# Altium PCB Powerbank_PCB.PcbDoc
Units mm, origin at the board's own origin, x right, y up, seen from the top; angles counter-clockwise.
Board outline 72.2 x 41.91 mm, 4 copper layers (Top Layer, 3V3, GND, Bottom Layer), stack 1.57 mm thick; 74 components, 44 nets, 257 pads, 101 vias.
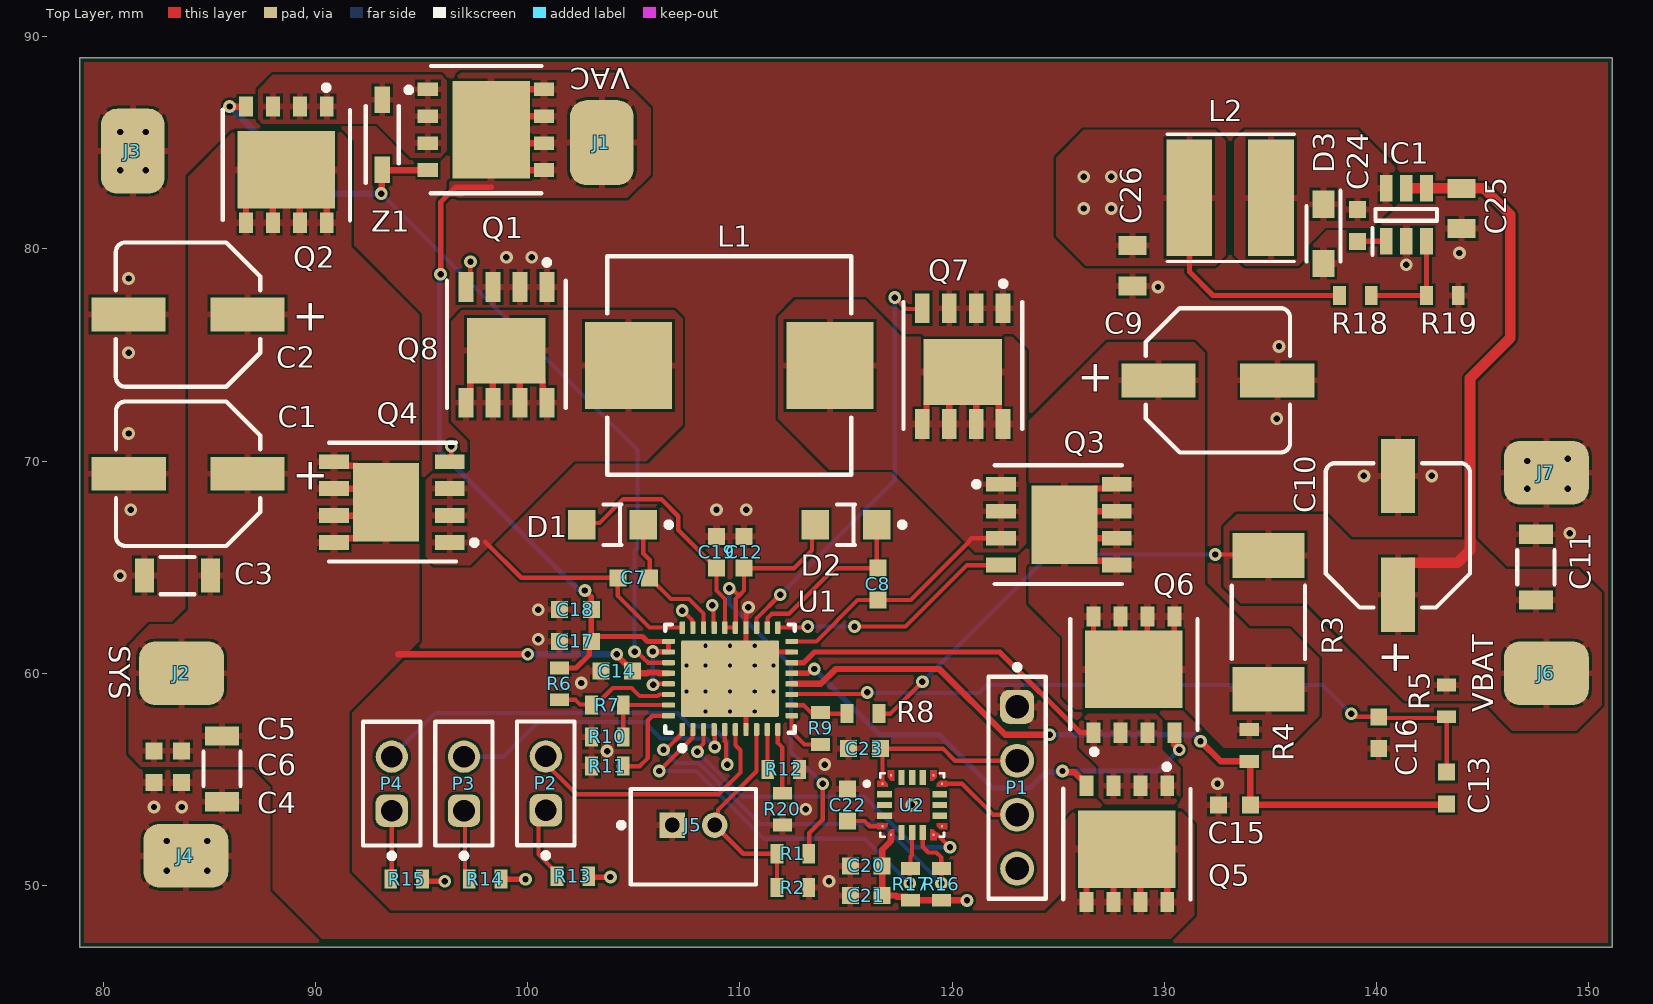
[diagram p0: Top Layer view]
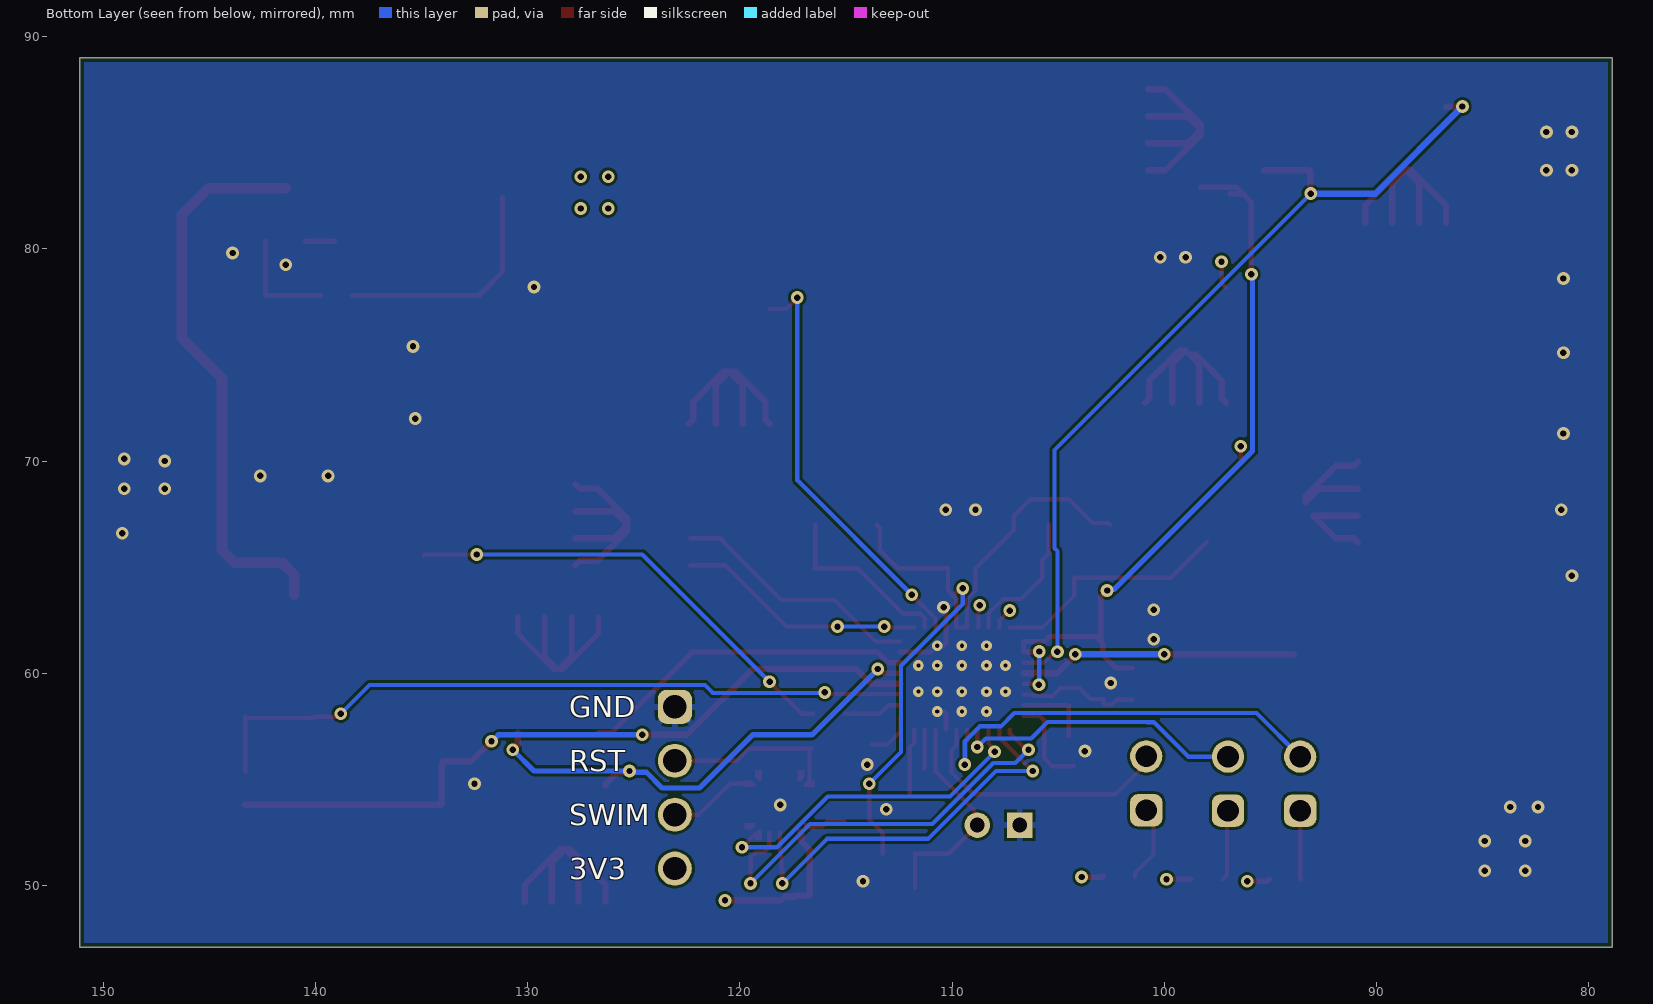
[diagram p1: Bottom Layer view, seen from below]
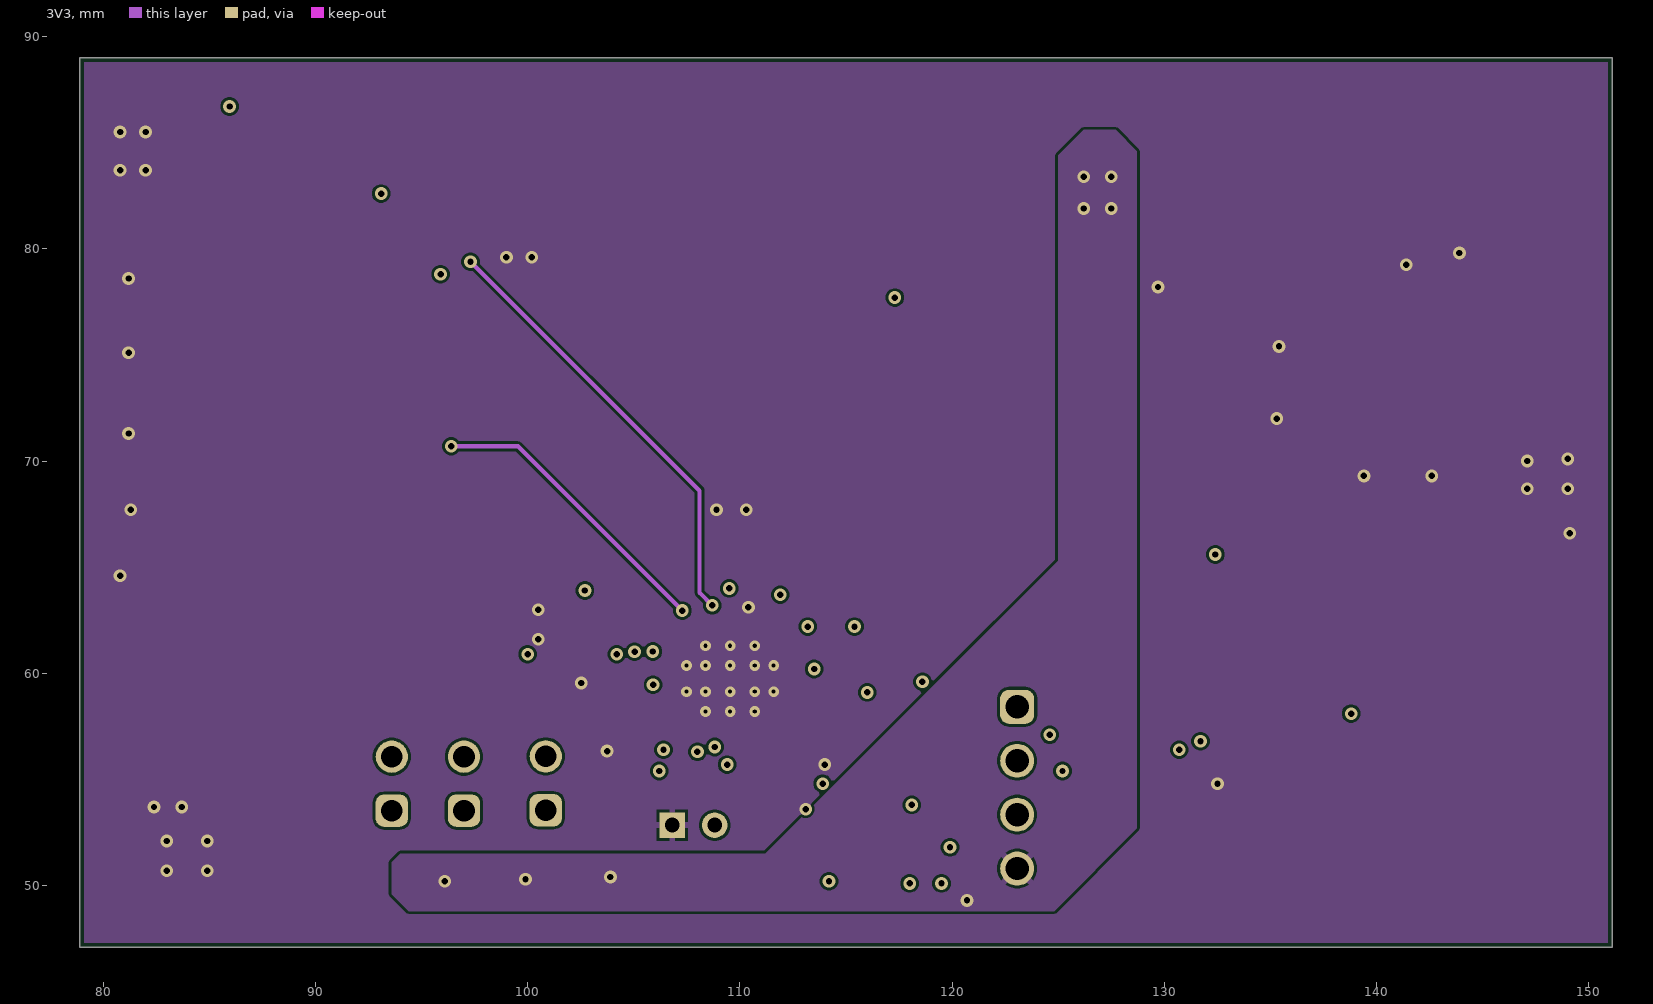
[diagram p2: 3V3]
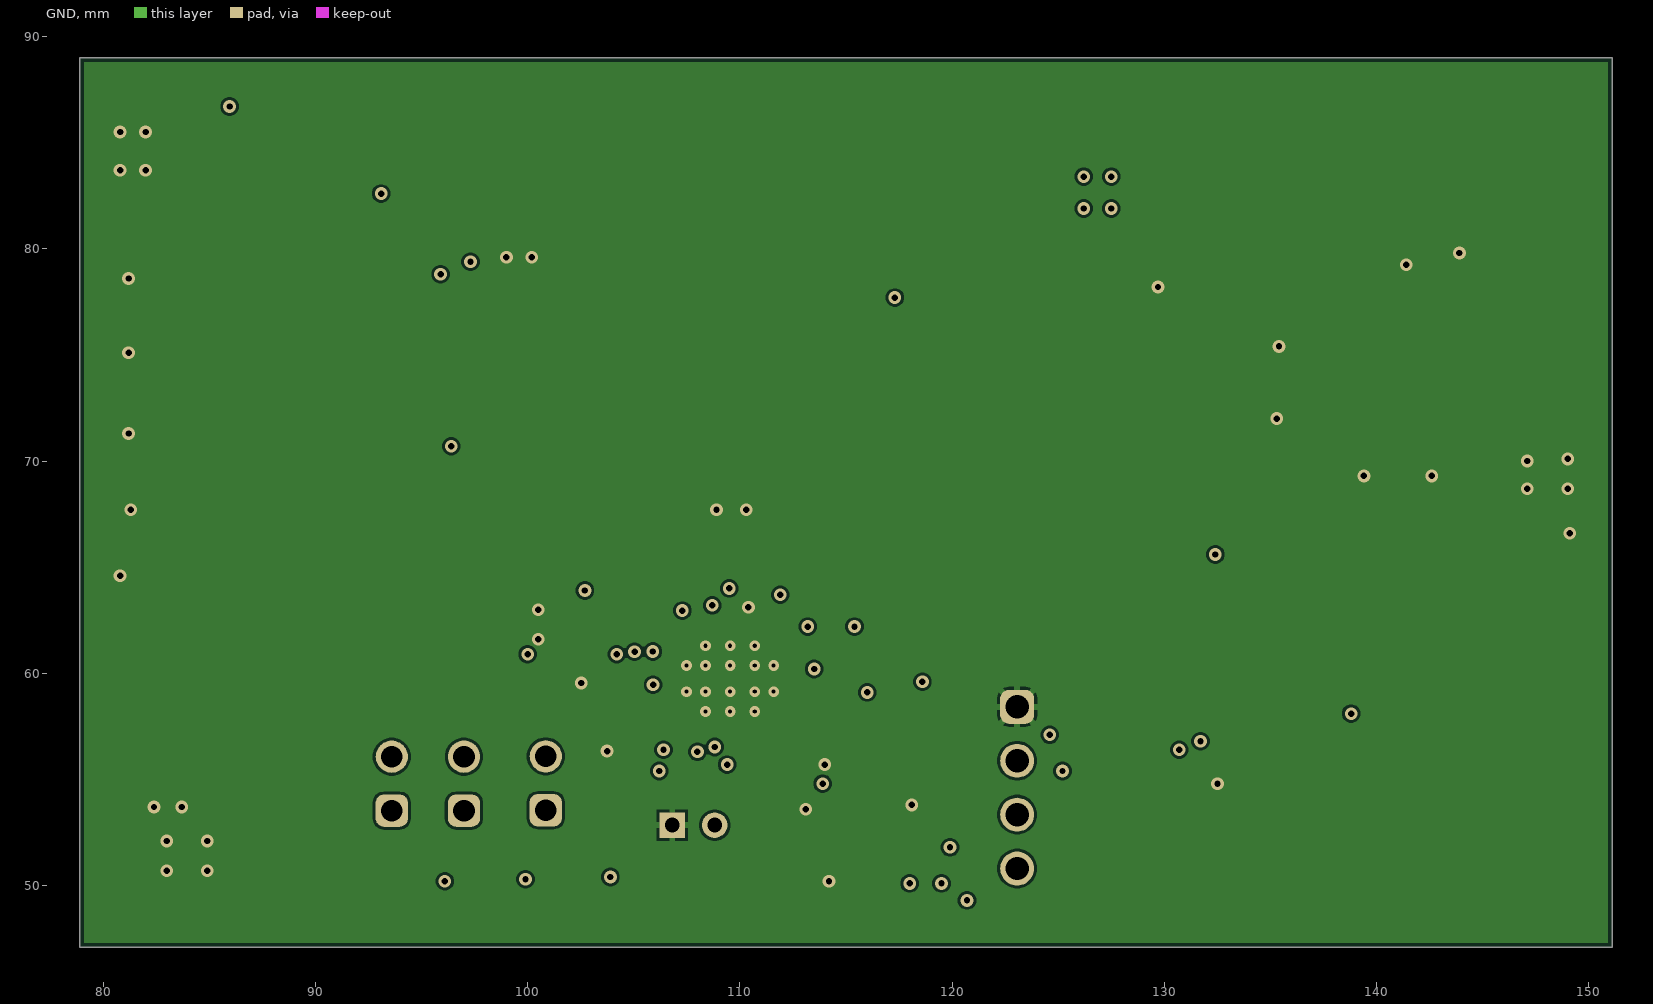
[diagram p3: GND]
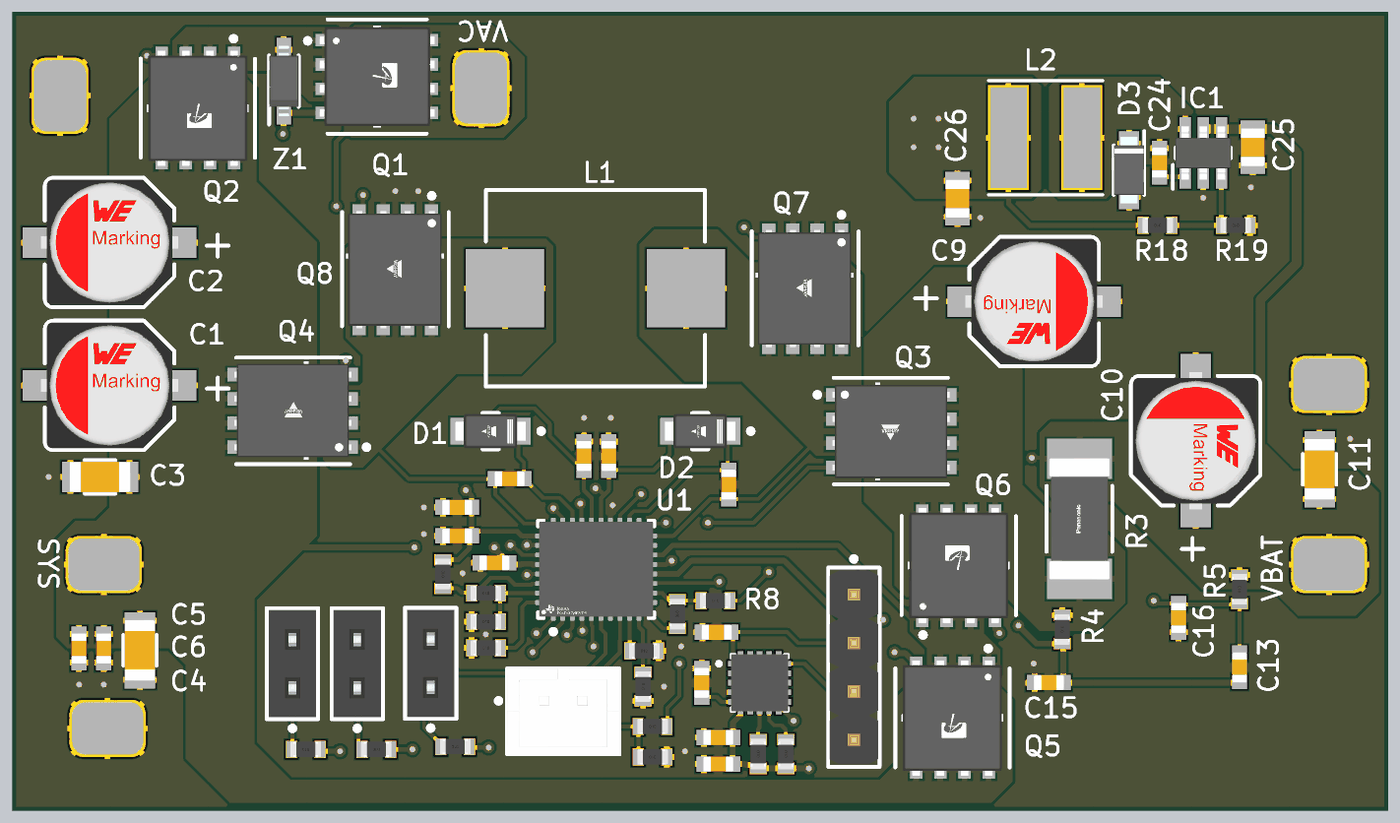
[diagram p4: 3D render of the assembled board from above, using the file's embedded part models]

## Layer stack, top to bottom
Top Solder: solder mask 0.0127, Solder Resist, Dk 3.8
Top Layer: signal copper 0.035
Dielectric 1: prepreg 0.2, 7628, Dk 4.6
3V3: signal copper 0.0175
Core: core 1.065, FR-4, Dk 4.5
GND: signal copper 0.0175
Dielectric 2: prepreg 0.2, 7628, Dk 4.6
Bottom Layer: signal copper 0.035
Bottom Solder: solder mask 0.0127, Solder Resist, Dk 3.8

## Board outline
78.9,47.09 78.9,89 151.1,89 151.1,47.09

## Design rules (kind name [scope] priority, off if disabled: settings)
BoardOutlineClearance [All] p1: gap=0.2 ignorepadtopadclearanceinfootprint=FALSE
Clearance [All] p1: gap=0.127 ignorepadtopadclearanceinfootprint=FALSE except(0.25: Arc-Hole Track-Hole SMDPad-Hole THPad-Hole Via-Hole Fill-Hole Poly-Hole Region-Hole Text-Hole)
ComponentClearance [All] p1: gap=0.127 collisioncheckmode=3 verticalgap=0.127 showdistances=TRUE
DiffPairsRouting [All] p1: maxlimit=0.254 minlimit=0.127 mostfreqgap=0.254 toplayer_prefgap=0.127 toplayer_minwidth=0.127 toplayer_maxwidth=25.4 toplayer_prefwidth=0.127 midlayer1_mingap=0.254 midlayer1_minwidth=0.381 midlayer1_maxwidth=0.381 midlayer1_prefwidth=0.381 midlayer2_mingap=0.254 midlayer2_minwidth=0.381 midlayer2_maxwidth=0.381 midlayer2_prefwidth=0.381 bottomlayer_prefgap=0.127 bottomlayer_minwidth=0.127 bottomlayer_maxwidth=25.4 bottomlayer_prefwidth=0.127 maxuncoupledlength=12.7
Height [All] p1: minheight=0 maxheight=1816.048 prefheight=12.7
HoleSize [All] p1: absolutevalues=TRUE maxlimit=6.3 minlimit=0.15 maxpercent=80.000 minpercent=20.000
HoleToHoleClearance [All] p1: gap=0.25 allowstackedmicrovias=FALSE
MinimumAnnularRing [All] p1: minimumring=0.075
MinimumSolderMaskSliver [All] p1: minsoldermaskwidth=0
PlaneClearance [All] p1: clearance=0.127
PlaneConnect PlaneConnectPowerPads [InPadClass('PowerPads')] p1: planeconnectstyle=Direct reliefexpansion=0.508 reliefentries=4 reliefconductorwidth=0.254 reliefairgap=0.254
PlaneConnect [All] p2: pad.planeconnectstyle=Relief pad.reliefexpansion=0.3 pad.reliefentries=4 pad.reliefconductorwidth=0.127 pad.reliefairgap=0.127 via.planeconnectstyle=Direct via.reliefexpansion=0.3 via.reliefentries=4 via.reliefconductorwidth=0.127 via.reliefairgap=0.127
PolygonConnect PolygonConnectPowerPads [All vs (InPadClass('PowerPads'))] p1: connectstyle=Direct reliefconductorwidth=0.254 reliefentries=4 polygonreliefangle="90 Angle" airgapwidth=0.254
PolygonConnect [All] p2: thpad.connectstyle=Relief thpad.reliefconductorwidth=0.3 thpad.reliefentries=4 thpad.polygonreliefangle="90 Angle" thpad.airgapwidth=0.127 thpad.conductorbypadedge=TRUE thpad.mindistance=0.381 thpad.enablemindistance=FALSE smdpad.connectstyle=Relief smdpad.reliefconductorwidth=0.3 smdpad.reliefentries=4 smdpad.polygonreliefangle="90 Angle" smdpad.airgapwidth=0.127 smdpad.conductorbypadedge=TRUE smdpad.mindistance=0.381 smdpad.enablemindistance=FALSE via.connectstyle=Direct via.reliefconductorwidth=0.127 via.reliefentries=4 via.polygonreliefangle="90 Angle" via.airgapwidth=0.127
RoutingVias [All] p1: holewidth=0.3 width=0.6 viastyle="Through Hole" minholewidth=0.3 minwidth=0.6 maxholewidth=0.6 maxwidth=6.6
SilkToSilkClearance [All] p1: silktosilkclearance=0
SilkToSolderMaskClearance [IsPad] p1: minsilkscreentomaskgap=0.127 clearancetoexposedcopper=TRUE
SolderMaskExpansion SolderMaskExpansionVia [isVia] p1: expansion=0.102 istentingtop=TRUE
SolderMaskExpansion [All] p2: expansion=0.075 istentingtop=FALSE useseparateexpansions=TRUE expansionbottom=0.075 istentingbottom=FALSE
SupplyNets "Schematic Supply Nets_7" [InNet('VIN')] p1: voltage=0.000
SupplyNets "Schematic Supply Nets_6" [InNet('VSYS')] p2: voltage=0.000
SupplyNets "Schematic Supply Nets_5" [InNet('3V3')] p3: voltage=0.000
SupplyNets "Schematic Supply Nets_4" [InNet('GND')] p4: voltage=0.000
SupplyNets "Schematic Supply Nets_2" [InNet('P_OUT')] p5: voltage=0.000
SupplyNets "Schematic Supply Nets_1" [InNet('VBAT')] p6: voltage=0.000
Width [All] p1: maxlimit=25.4 minlimit=0.127 preferedwidth=0.127 midlayer1_maxwidth=0.254 midlayer2_maxwidth=0.254 minimp=50.000000 maximp=50.000000 favimp=50.000000
20 further rules are at their usual default settings.

## Classes and differential pairs
component class 3V3_Buck_Regulator: C24 C25 C26 D3 IC1 L2 R18 R19
component class STM8S003F3: C20 C21 C22 C23 P1 R16 R17 U2
component class BQ25750: C1 C2 C3 C4 C5 C6 C7 C8 C9 C10 C11 C12 C13 C14 C15 C16 C17 C18 C19 D1 D2 J1 J2 J3 J4 J5 J6 J7 L1 P2 P3 P4 Q1 Q2 Q3 Q4 Q5 Q6 Q7 Q8 R1 R2 R3 R4 R5 R6 R7 R8 R9 R10 R11 R12 R13 R14 R15 R20 U1 Z1

## Components (designator, comment, footprint, x,y, rotation, side; value= is the part's Value field where it differs from the comment)
C1 "Nichicon 68uF/35V Elco" "Wurth D6.3x7.7mm" 84.001,69.402 r0 top value=68uF/35V
C2 "Nichicon 68uF/35V Elco" "Wurth D6.3x7.7mm" 84,76.9 r0 top value=68uF/35V
C3 "Generic Capacitor 47uF 1206" "Wurth 1206 Capacitor" 83.5,64.6 r0 top value=47uF
C4 "Generic Capacitor 1uF 1206" "Wurth 1206 Capacitor" 85.6,55.5 r90 top value=1uF
C5 "Generic Capacitor 100nF 0603" "Wurth 0603 capacitor" 82.4,55.6 r90 top value=100nF
C6 "Generic Capacitor 1nF 0603" "Wurth 0603 capacitor" 83.7,55.6 r90 top value=1nF
C7 "Generic Capacitor 100nF 0603" "Wurth 0603 capacitor" 105,64.5 r180 top value=100nF
C8 "Generic Capacitor 100nF 0603" "Wurth 0603 capacitor" 116.5,64.2 r270 top value=100nF
C9 "Nichicon 68uF/35V Elco" "Wurth D6.3x7.7mm" 132.523,73.804 r180 top value=68uF/35V
C10 "Nichicon 68uF/35V Elco" "Wurth D6.3x7.7mm" 141,66.5 r270 top value=68uF/35V
C11 "Generic Capacitor 47uF 1206" "Wurth 1206 Capacitor" 147.5,65 r270 top value=47uF
C12 "Generic Capacitor 4.7uF 0603" "Wurth 0603 capacitor" 110.2,65.7 r270 top value=4.7uF
C13 "Generic Capacitor 470nF 0603" "Wurth 0603 capacitor" 143.3,54.6 r90 top value=470nF
C14 "Generic Capacitor 100nF 0603" "Wurth 0603 capacitor" 104.2,60.1 r0 top value=100nF
C15 "Generic Capacitor 100nF 0603" "Wurth 0603 capacitor" 133.3,53.8 r180 top value=100nF
C16 "Generic Capacitor 100nF 0603" "Wurth 0603 capacitor" 140.1,57.2 r90 top value=100nF
C17 "Generic Capacitor 1uF 0603" "Wurth 0603 capacitor" 102.25,61.5 r0 top value=1uF
C18 "Generic Capacitor 100nF 0603" "Wurth 0603 capacitor" 102.25,63 r0 top value=100nF
C19 "Generic Capacitor 4.7uF 0603" "Wurth 0603 capacitor" 108.9,65.7 r270 top value=4.7uF
C20 "Generic Capacitor 100nF 0603" "Wurth 0603 capacitor" 115.951,50.927 r0 top value=100nF
C21 "Generic Capacitor 4.7uF 0603" "Wurth 0603 capacitor" 115.951,49.53 r0 top value=4.7uF
C22 "Generic Capacitor 1uF 0603" "Wurth 0603 capacitor" 115.078,53.794 r270 top value=1uF
C23 "Generic Capacitor 100nF 0603" "Wurth 0603 capacitor" 115.865,56.451 r0 top value=100nF
C24 "Generic Capacitor 100nF 0603" "Wurth 0603 capacitor" 139.1,81.1 r90 top value=100nF
C25 "Generic Capacitor 22uF 0805" "Wurth 0805 capacitor" 144,81.9 r90 top value=22uF
C26 "Generic Capacitor 22uF 0805" "Wurth 0805 capacitor" 128.5,79.2 r90 top value=22uF
D1 "V1FM10-M3/H" FP-V1FM10-M3-H-MFG 104,67 r0 top
D2 "V1FM10-M3/H" FP-V1FM10-M3-H-MFG 115,67 r0 top
D3 "Diode RF071MM2STFTR" "Rohm SOD-123" 137.5,80.7 r270 top
IC1 "MP2459GJ-Z-MS" "Texas InstrumentsSOT95P280X110-6N" 141.4,81.6 r90 top
J1 "IN+" "Solder Pad 3X4MM" 103.5,85 r0 top
J2 "OUT+" "Solder Pad 3X4MM" 83.7,60 r90 top
J3 "IN-" "Solder Pad 3X4MM" 81.4,84.6 r0 top
J4 "OUT-" "Solder Pad 3X4MM" 83.9,51.4 r90 top
J5 "B2B-PH-K(LF)(SN)" FP-B2B-PH-K_LF_SN-MFG 107.813,52.295 r180 top
J6 "BAT+" "Solder Pad 3X4MM" 148,60 r270 top
J7 "BAT-" "Solder Pad 3X4MM" 148,69.446 r90 top
L1 "Cjiang Inductor 10uH 8A" "Cjiang 11.5x10mm inductor" 109.5,74.5 r0 top value=10uH
L2 "COILS SMTDR54-270M" "3L COILS 5.2X5.8MM" 133.1,82.4 r0 top value=27uH
P1 "61300411121" "4x1 2.54mm M" 123.063,54.61 r270 top
P2 "61300211121" "2x1 2.54mm F" 100.855,54.818 r90 top
P3 "61300211121" "2x1 2.54mm F" 97,54.8 r90 top
P4 "61300211121" "2x1 2.54mm F" 93.6,54.8 r90 top
Q1 "HYG025N06LS1C2" "Huayi PDFN8L" 98.052,85.611 r270 top
Q2 "HYG025N06LS1C2" "Huayi PDFN8L" 88.635,83.945 r180 top
Q3 "SIR880BDP" "Vishay PowerPAKSO-8" 125,67 r0 top
Q4 "SIR880BDP" "Vishay PowerPAKSO-8" 93.633,68.065 r180 top
Q5 "HYG025N06LS1C2" "Huayi PDFN8L" 128.235,51.945 r180 top
Q6 "HYG025N06LS1C2" "Huayi PDFN8L" 128.565,59.955 r0 top
Q7 "SIR880BDP" "Vishay PowerPAKSO-8" 120.5,74.5 r270 top
Q8 "SIR880BDP" "Vishay PowerPAKSO-8" 99,75.5 r270 top
R1 "Generic Resistor 5k23 0603" "Wurth 0603 Resistor" 112.5,51.5 r0 top value=5k23
R2 "Generic Resistor 30k1 0603" "Wurth 0603 Resistor" 112.5,49.9 r180 top value=30k1
R3 "ERJ-M1WSF5M0U" FP-ERJM1WS-MFG 134.9,62.4 r90 top
R4 "Generic Resistor 10R 0603" "Wurth 0603 Resistor" 134,56.6 r90 top value=10R
R5 "Generic Resistor 10R 0603" "Wurth 0603 Resistor" 143.3,58.7 r90 top value=10R
R6 "Generic Resistor 1M 0603" "Wurth 0603 Resistor" 101.5,59.5 r90 top value=1M
R7 "Generic Resistor 27k4 0603" "Wurth 0603 Resistor" 103.757,58.5 r180 top value=27k4
R8 "Generic Resistor 249k 0603" "Wurth 0603 Resistor" 115.8,58.1 r0 top value=249k
R9 "Generic Resistor 12k 0603" "Wurth 0603 Resistor" 113.8,57.4 r270 top value=12k
R10 "Generic Resistor 52k3 0603" "Wurth 0603 Resistor" 103.757,57 r0 top value=52k3
R11 "Generic Resistor 47k5 0603" "Wurth 0603 Resistor" 103.757,55.626 r0 top value=47k5
R12 "Generic Resistor 7k68 0603" "Wurth 0603 Resistor" 112.06,55.473 r0 top value=7k68
R13 "Generic Resistor 330R 0603" "Wurth 0603 Resistor" 102.136,50.441 r180 top value=330R
R14 "Generic Resistor 100R 0603" "Wurth 0603 Resistor" 98,50.3 r180 top value=100R
R15 "Generic Resistor 100R 0603" "Wurth 0603 Resistor" 94.3,50.3 r180 top value=100R
R16 "Generic Resistor 10k 0603" "Wurth 0603 Resistor" 119.492,50.056 r270 top value=10k
R17 "Generic Resistor 10k 0603" "Wurth 0603 Resistor" 118.044,50.056 r270 top value=10k
R18 "Generic Resistor 37k4 0603" "Wurth 0603 Resistor" 139,77.8 r180 top value=37k4
R19 "Generic Resistor 12k 0603" "Wurth 0603 Resistor" 143.1,77.8 r180 top value=12k
R20 "Generic Resistor 0R 0603" "Wurth 0603 Resistor" 112,53.6 r90 top value=0R
U1 "BQ25750RRVR" FP-RRV0036A-MFG 109.538,59.752 r90 top
U2 "STM8S003F3U6TR" "ST UFQFPN20" 118.365,53.794 r0 top
Z1 "BZT52B15" "Yongyutai SOD-123" 93.15,85.372 r90 top

## Footprints (in the part's own frame and the unit in brackets; to place one, negate y for a bottom-side part, rotate by r counter-clockwise, add the part's x,y. Pads: shape width x height; smd on the part's side, far side on the other; paste and mask are expansions set on the pad)
"2x1 2.54mm F" [mm] "Socket Header, Pitch 2.54 mm, THT, Vertical, single row, 2p"
  rrect50% 1.52x1.52 hole 1.02: 1(-1.27,0)
  round 1.52 hole 1.02: 2(1.27,0)
  silkscreen extent -3.52,-1.35 2.92,1.35, body extent -2.79,-1.25 2.79,1.25, height 8.55
"3L COILS 5.2X5.8MM" [mm]
  rect 2.15x5.5 smd paste-0.12 mask+0.1: 1(1.925,0) 2(-1.925,0)
  silkscreen extent -2.98,-3 3.03,3
"4x1 2.54mm M" [mm] "Pin Header, pitch 2.54 mm, THT, Vertical, single row, 4p"
  rrect50% 1.6x1.6 hole 1.1: 1(-3.81,0)
  round 1.6 hole 1.1: 2(-1.27,0) 3(1.27,0) 4(3.81,0)
  silkscreen extent -5.8,-1.35 5.23,1.35, body extent -5.08,-1.27 5.08,1.27, height 8.57
"Cjiang 11.5x10mm inductor" [mm] "Precision Wire Wound Inductor, 2-Leads, Body 11,50x10,00mm, IPC Medium Density"
  rect 4.1x4.1 smd: 1(-4.75,0) 2(4.75,0)
  silkscreen extent -5.75,-5.15 5.75,5.15, body extent -5.75,-5.15 5.75,5.15, height 5
FP-B2B-PH-K_LF_SN-MFG [mm]
  rect 1.2x1.2 hole 0.7 paste-2539.97 mask+0: 1(1,-0.55)
  round 1.2 hole 0.7 paste-2539.97 mask+0: 2(-1,-0.55)
  silkscreen extent -2.95,-2.25 3.52,2.25, body extent -3.05,-2.35 3.05,2.35, height 0.25
FP-ERJM1WS-MFG [mm]
  rect 2.1x3.4 smd paste+0 mask+0: 1(-3.15,0) 2(3.15,0)
  silkscreen extent -1.73,-1.73 1.73,1.73, body extent -4.3,-1.83 4.3,1.83, height 0.25
FP-RRV0036A-MFG [mm]
  rrect40% 0.6x0.25 smd paste+0 mask+0: 1(-2.4,2.25) 2(-2.4,1.75) 3(-2.4,1.25) 4(-2.4,0.75) 5(-2.4,0.25) 6(-2.4,-0.25) 7(-2.4,-0.75) 8(-2.4,-1.25) 9(-2.4,-1.75) 10(-2.4,-2.25) 19(2.4,-2.25) 20(2.4,-1.75) 21(2.4,-1.25) 22(2.4,-0.75) 23(2.4,-0.25) 24(2.4,0.25) 25(2.4,0.75) 26(2.4,1.25) 27(2.4,1.75) 28(2.4,2.25)
  rrect40% 0.25x0.6 smd paste+0 mask+0: 11(-1.75,-2.9) 12(-1.25,-2.9) 13(-0.75,-2.9) 14(-0.25,-2.9) 15(0.25,-2.9) 16(0.75,-2.9) 17(1.25,-2.9) 18(1.75,-2.9) 29(1.75,2.9) 30(1.25,2.9) 31(0.75,2.9) 32(0.25,2.9) 33(-0.25,2.9) 34(-0.75,2.9) 35(-1.25,2.9) 36(-1.75,2.9)
  rrect3% 3.6x4.6 smd paste-1000 mask+0: 37(0,0)
  silkscreen extent -3.4,-3.05 2.55,3.05, body extent -2.8,-3.3 2.8,3.3, height 0.25
FP-V1FM10-M3-H-MFG [mm]
  rect 1.3x1.4 smd paste+0 mask+0: 1(1.45,0) 2(-1.45,0)
  silkscreen extent -0.43,-0.95 2.78,0.95, body extent -2.2,-1.05 2.2,1.05, height 0.25
"Huayi PDFN8L" [mm]
  rect 0.65x0.95 smd paste+0 mask+0: 1(-1.905,-2.755) 2(-0.635,-2.755) 3(0.635,-2.755) 4(1.905,-2.755) 5-6-7-8(-1.905,2.72) 5-6-7-8(-0.635,2.72) 5-6-7-8(0.635,2.72) 5-6-7-8(1.905,2.72)
  rect 4.6x3.65 smd paste+0 mask+0: 5-6-7-8(0,0.225)
  silkscreen extent -3,-3.77 3,2.6, body extent -2.9,-3.18 2.9,3.17, height 0.25
"Rohm SOD-123" [mm]
  rect 1.28x1.04 smd: 1(-1.4,0) 2(1.4,0)
  silkscreen extent -2.04,-0.8 1.3,0.8, body extent -1.75,-0.8 1.75,0.8, height 0.9
"Solder Pad 3X4MM" [mm]
  rrect50% 3x4 smd paste-0.134 mask+0.1: 1(0,0)
"ST UFQFPN20" [mm]
  rect 0.1x0.1 smd paste-1 mask+0: 1(-1.65,1) 5(-1.65,-1) 6(-1.25,-1.4) 10(0.75,-1.4) 11(1.15,-1) 15(1.15,1) 16(0.75,1.4) 20(-1.25,1.4)
  rect 0.7x0.3 smd: 2(-1.55,0.5) 3(-1.55,0) 4(-1.55,-0.5) 12(1.05,-0.5) 13(1.05,0) 14(1.05,0.5)
  rect 0.3x0.7 smd: 7(-0.75,-1.3) 8(-0.25,-1.3) 9(0.25,-1.3) 17(0.25,1.3) 18(-0.25,1.3) 19(-0.75,1.3)
  Top Layer region: -1.4,-1 -1.55,-1.15 -1.9,-1.15 -1.9,-0.85 -1.4,-0.85
  Top Layer region: 1.4,0.85 0.9,0.85 0.9,1 1.05,1.15 1.4,1.15
  Top Layer region: 0.9,-1.3 0.9,-1.65 0.6,-1.65 0.6,-1.15 0.75,-1.15
  Top Layer region: -1.1,1.15 -1.25,1.15 -1.4,1.3 -1.4,1.65 -1.1,1.65
  Top Layer region: 0.9,1.3 0.75,1.15 0.6,1.15 0.6,1.65 0.9,1.65
  Top Layer region: -1.4,1 -1.4,0.85 -1.9,0.85 -1.9,1.15 -1.55,1.15
  Top Layer region: -1.1,-1.65 -1.4,-1.65 -1.4,-1.3 -1.25,-1.15 -1.1,-1.15
  Top Layer region: 1.4,-1.15 1.05,-1.15 0.9,-1 0.9,-0.85 1.4,-0.85
  silkscreen extent -2.48,-1.5 1.25,1.5, body extent -1.75,-1.5 1.25,1.5, height 0.6
"Texas InstrumentsSOT95P280X110-6N" [mm]
  rect 1.25x0.6 smd: 1(-1.25,0.95) 2(-1.25,0) 3(-1.25,-0.95) 4(1.25,-0.95) 5(1.25,0) 6(1.25,0.95)
  silkscreen extent -1.88,-1.45 0.28,1.6, body extent -1.4,-1.45 1.4,1.45, height 0.97
"Vishay PowerPAKSO-8" [mm]
  rect 1.4x0.7 smd paste+0 mask+0: 1(-2.7,1.905) 2(-2.7,0.635) 3(-2.7,-0.635) 4(-2.7,-1.905) 5-6-7-8(2.752,1.905) 5-6-7-8(2.752,-1.905) 5-6-7-8(2.752,-0.635) 5-6-7-8(2.752,0.635)
  rect 3.1x3.7 smd paste+0 mask+0: 5-6-7-8(0.3,0)
  silkscreen extent -3.98,-2.8 3,2.8, body extent -3.4,-2.73 3.4,2.73, height 0.25
"Wurth 0603 capacitor" [mm] "Ceramic Capacitors, body 1.6x0.8mm"
  rect 0.8x0.8 smd: 1(-0.75,0) 2(0.75,0)
  body extent -0.8,-0.4 0.8,0.4, height 0.8
"Wurth 0603 Resistor" [mm] "Fixed Thick Film, body 1.60 x 0.80 mm"
  rect 0.6x0.9 smd paste-0.028 mask+0.1: 1(-0.75,0) 2(0.75,0)
  body extent -0.8,-0.4 0.8,0.4, height 0.45
"Wurth 0805 capacitor" [mm] "Ceramic Capacitors, body 2x1.25mm"
  rect 0.9x1.3 smd: 1(-0.95,0) 2(0.95,0)
  body extent -1,-0.63 1,0.63, height 1.25
"Wurth 1206 Capacitor" [mm] "Ceramic Capacitors, body 3.2x1.6mm"
  rect 0.9x1.6 smd: 1(-1.55,0) 2(1.55,0)
  silkscreen extent -0.8,-0.87 0.8,0.87, body extent -1.6,-0.8 1.6,0.8, height 0.95
"Wurth D6.3x7.7mm" [mm] "Aluminum Hybrid Polymer Capacitor, SMT, body diameter 6.3mm"
  rect 3.5x1.6 smd: 1(2.8,0) 2(-2.8,0)
  silkscreen extent -3.4,-3.4 3.4,3.4, body extent -3.6,-3.3 3.6,3.3, height 7.75
"Yongyutai SOD-123" [mm]
  rect 1.25x0.75 smd: 1(-1.65,0) 2(1.65,0)
  silkscreen extent -2.27,-0.77 1.35,0.77, body extent -1.85,-0.77 1.85,0.77, height 1.35

## Part data
D1 D2: library part CMP-02539-000045-1, "1A 100V SMF TRENCH SKY RECT", RoHS Compliant=Yes
IC1: library part "MSKSEMI MP2459GJ-Z-MS", "Buck Converter 4.5V-60V 600mA"
J1 J2 J3 J4 J6 J7: library part "Solder pad"
J5: library part CMP-17439-000674-1, "Connector Header Through Hole 2 position 0.079\" (2.00mm)", Color=Beige, Current Rating=2A, Insulation Resistance=1GR, Max Operating Temperature=85°C, Min Operating Temperature=-25°C, Voltage Rating=100V, Contact Material=Brass, Contact Plating=Tin, Gender=Male, Lead Free="Lead Free", Material=Polyamide, Mount="Through Hole", Number of Positions=2, Number of Rows=1, Pitch=2mm, Termination=Crimp
L1: "Unchecked FXL1050-100-M 8A 10uH Integrated molded inductor ±20% 10A SMD, 10x11.5mm Power Inductors ROHS"
L2: library part "3L COILS SMTDR54-270M inductor", Manufacturer="3L Coils"
P1: library part 4P, "WR-PHD Pin Header, THT, Vertical, pitch 2.54mm, 1 Row, 4P", Contact Resistance=20mOhm, Manufacturer="Wurth Elektronik", Operating Temperature Max=105°C, Operating Temperature Min=-40°C, Rated Current=3A, Withstanding Voltage=500V, Working Voltage=250V, Category="Board-to-Board Connectors", ComponentLink1Description="Website Link", ComponentLink1URL=https://www.we-online.com/redexpert/article/61300411121?ad, ComponentLink2Description="Datasheet Link", ComponentLink2URL=https://www.we-online.com/redexpert/spec/61300411121?ad, Gender="Pin Header", Manufacturer Part Number=61300411121, Match Code=WR-PHD, Mount="Through Hole", Number of Pins=4, Number of Rows=1, Orientation=Vertical, Packaging=Bag, Pitch=2.54mm
P2 P3 P4: library part 2P, "WR-PHD Pin Header, THT, Vertical, pitch 2.54mm, 1 Row, 2P", Contact Resistance=20mOhm, Manufacturer="Wurth Elektronik", Operating Temperature Max=105°C, Operating Temperature Min=-40°C, Rated Current=3A, Withstanding Voltage=500V, Working Voltage=250V, Category="Board-to-Board Connectors", ComponentLink1Description="Website Link", ComponentLink1URL=https://www.we-online.com/redexpert/article/61300211121?ad, ComponentLink2Description="Datasheet Link", ComponentLink2URL=https://www.we-online.com/redexpert/spec/61300211121?ad, Gender="Pin Header", Manufacturer Part Number=61300211121, Match Code=WR-PHD, Mount="Through Hole", Number of Pins=2, Number of Rows=1, Orientation=Vertical, Packaging=Bag, Pitch=2.54mm
Q1 Q2 Q5 Q6: library part "Huayi HYG025N06LS1C2", "MOSFET N-CH VDS = 60V,ID = 170A, VGS = 20V PDFN8L", ComponentLink2Description=Datasheet, ComponentLink2URL=https://www.diodes.com/assets/Datasheets/ds30938.pdf
Q3 Q4 Q7 Q8: library part "Vishay SIR880BDP", "Mosfet, N-Ch, 80V, 70.6A, 150Degc, 71.4W Rohs Compliant: Yes", Continuous Drain Current (ID)=70.6A, Drain To Source Breakdown Voltage=80V, Drain to Source Resistance=8mΩ, Gate to Source Voltage (Vgs)=20V, Manufacturer=Vishay, Manufacturer Package Identifier=S17-0173-Single, Manufacturer Part Number=SIR880BDP-T1-RE3, Max Junction Temperature (Tj)=150°C, Max Power Dissipation=71.4W, Min Operating Temperature=-55°C, Power Dissipation=5W, Supplier Part Number=2282914, Category=MOSFETs, ComponentLink1Description=https://datasheet.octopart.com:443/SIR880BDP-T1-RE3-Vishay-datasheet-165496184.pdf?src-supplier=Upverter, ComponentLink1URL=https://datasheet.octopart.com:443/SIR880BDP-T1-RE3-Vishay-datasheet-165496184.pdf?src-supplier=Upverter, ComponentLink2Description=https://sigma.octopart.com:443/138898934/technical_drawing/Vishay-SIR880BDP-T1-RE3.pdf?src-supplier=Upverter, ComponentLink2URL=https://sigma.octopart.com:443/138898934/technical_drawing/Vishay-SIR880BDP-T1-RE3.pdf?src-supplier=Upverter, ComponentLink3Description=https://datasheet.octopart.com:443/SIR880BDP-T1-RE3-Vishay-datasheet-181474081.pdf?src-supplier=IHS, ComponentLink3URL=https://datasheet.octopart.com:443/SIR880BDP-T1-RE3-Vishay-datasheet-181474081.pdf?src-supplier=IHS, ComponentLink4Description=http://sigma.octopart.com:80/rohs_statement/Vishay-company-15.pdf?src-supplier=Compliance+Statements, ComponentLink4URL=http://sigma.octopart.com:80/rohs_statement/Vishay-company-15.pdf?src-supplier=Compliance+Statements, Drain to Source Voltage (Vdss)=80V, Height=1.12mm, Lifecycle Status=Production, Max Operating Temperature=150°C, Min Breakdown Voltage=80V, Number of Channels=1, Number of Elements=1, Number of Terminals=8, Pricing="10=1,116, 100=1,05, 250=0,949, 500=0,893, 1000=0,838 (EUR)", RoHS=Compliant, Stock=5590, Supplier=RS, Turn-Off Delay Time=40ns, Turn-On Delay Time=12ns
R3: library part CMP-05422-000103-1, "RES 0.005 OHM 1% 1W 2512", Case Code (Imperial)=2512, Case Code (Metric)=6432, Max Operating Temperature=170°C, Max Power Dissipation=1W, Min Operating Temperature=-55°C, Package Quantity=1, Resistance=5mR, Resistance Tolerance=1%, Resistor Type="Metal Strip", Temperature Coefficient=100ppm/°C, Case/Package=2512, Construction=Rectangular, Contact Plating=Tin, Depth=3.2mm, Height=0.8mm, Lead Free="Lead Free", Length=6.4mm, Military Standard=Not, Mount="Surface Mount", Number of Pins=2, Number of Terminations=2, Packaging="Tape and Reel", Power Rating=1W, Radiation Hardening=No, REACH SVHC="No SVHC", RoHS Compliant=Yes, Series=ERJ, Size Code=2512, Technology="THICK FILM", Termination=SMD/SMT, Tolerance=1%, Width=3.2mm
U1: library part CMP-00370-145540039-1, "BQ25750RRVR Stand-alone or I²C-controlled 70-V bidirectional buck-boost charge controller with power path 36-VQFN -40 to 125", Ambient Temperature Range High=105°C, Case/Package=VQFN, Manufacturer Lifecycle Status=ACTIVE, Max Junction Temperature (Tj)=125°C, Max Supply Voltage=70V, Min Operating Temperature=-40°C, Min Supply Voltage=4.2V, Output Current=20A, Height=0m, Length=6mm, Lifecycle Status=Production, Max Operating Temperature=125°C, NexarPartId=145540039, Number of Cells=16, Number of Pins=36, Thickness=900µm, Width=5mm
U2: "Microcontroller, 8-Bit, FLASH, STM8S CPU, 16MHz, CMOS", Case/Package=VQCCN, Clock Frequency=16MHz, Manufacturer=STMicroelectronics, Max Operating Temperature=85°C, Max Supply Current=2.35mA, Max Supply Voltage=5.5V, Min Operating Temperature=-40°C, Min Supply Voltage=2.95V, Nominal Supply Voltage=5V, Package Shape=Square, Power Supplies=3/5, Supplier Part Number=511-STM8S003F3U6TR, Temperature Grade=INDUSTRIAL, Category=Microcontrollers, ComponentLink1Description=https://datasheet.ciiva.com:443/pdfs/VipMasterIC/IC/SGST/SGST-S-A0006184982/SGST-S-A0006184982-1.pdf?src-supplier=IHS+Markit, ComponentLink1URL=https://datasheet.ciiva.com:443/pdfs/VipMasterIC/IC/SGST/SGST-S-A0006184982/SGST-S-A0006184982-1.pdf?src-supplier=IHS+Markit, ComponentLink2Description=https://datasheet.ciiva.com/28626/1690469-28626624.pdf?src-supplier=Element14, ComponentLink2URL=https://datasheet.ciiva.com/28626/1690469-28626624.pdf?src-supplier=Element14, ComponentLink3Description=https://datasheet.ciiva.com/6645/dm00024550-6645069.pdf?src-supplier=Digikey, ComponentLink3URL=https://datasheet.ciiva.com/6645/dm00024550-6645069.pdf?src-supplier=Digikey, ComponentLink4Description=https://datasheet.ciiva.com/9223/dm00024550-9223573.pdf?src-supplier=Avnet, ComponentLink4URL=https://datasheet.ciiva.com/9223/dm00024550-9223573.pdf?src-supplier=Avnet, ComponentLink5Description=https://datasheet.ciiva.com/13037/dm00024550-13037151.pdf?src-supplier=Mouser, ComponentLink5URL=https://datasheet.ciiva.com/13037/dm00024550-13037151.pdf?src-supplier=Mouser, ComponentLink6Description=https://datasheet.ciiva.com/16491/dm00024550-16491262.pdf?src-supplier=Future+Electronics, ComponentLink6URL=https://datasheet.ciiva.com/16491/dm00024550-16491262.pdf?src-supplier=Future+Electronics, Height - Seated (Max)=0.6mm, Interface=I2C,SPI,UART, JESD-30 Code=S-XQCC-N20, Length=3mm, Manufacturer Part Number=STM8S003F3U6TR, Mfr_Name=STMicroelectronics, Number of I/O Lines=16, Peripherals=POR,WDT, Pins=20, Pricing="1=0,8, 10=0,569, 50=0,513, 100=0,45, 1000=0,387, 10000=0,367 (USD)", Qualification Status="Not Qualified", Reach SVHC Compliant=Yes, RefDes=RefDes, RoHS=Yes, RoHS Compliant=Yes, Stock=19718, Supplier=Mouser, Surface Mount=Yes, Technology=CMOS, Terminal Form="No Lead", Terminal Pitch=0.5mm, Terminal Position=QUAD, Type=Type, Width=3mm
Z1: "Zener Diode", Arrow Part Number=BZT52B15-E3-18, Manufacturer_Name=Vishay, Mouser Part Number=78-BZT52B15-E3-18, Arrow Price/Stock=https://www.arrow.com/en/products/bzt52b15-e3-18/vishay?region=nac, Datasheet Link=https://www.vishay.com/docs/85760/bzt52.pdf, Height=1.35mm, Manufacturer_Part_Number=BZT52B15-E3-18, Mouser Price/Stock=https://www.mouser.co.uk/ProductDetail/Vishay-Semiconductors/BZT52B15-E3-18?qs=KP8Io%2FXyE5SvlbRZ336LSg%3D%3D

## Via types
v1: diameter 0.6, hole 0.3, Top Layer to Bottom Layer, tented both sides, 85 vias
v2: diameter 0.5, hole 0.2, Top Layer to Bottom Layer, 16 vias

## Nets (pads, with @x,y where several pads share a name; then routed paths per layer and width w, separated by ;. In a path a pad name is that pad's centre, name@x,y a point inside that pad or via, vN(x,y) a via of type N, cw(c..) or ccw(c..) an arc to the next point about the centre after c; other vN are vias at no path point)
3V3: C20.2 C21.2 C26.2 L2.2 P1.4 R13.1 R14.1 R15.1 R16.2 R17.2 R18.2 U2.6 | length 21.4
  Top Layer w0.254: R15.1 95.15,50.2 v1(96.1,50.2) ; R14.1 v1(99.9,50.3) ; R13.1 102.927,50.4 v1(103.9,50.4) ; L2.2 131.182,82.393 131.182,78.918 132.3,77.8 R18.2
  Top Layer w0.3: U2.6 117.115,52.091 116.713,51.689 116.713,50.939 C20.2 C21.2 117.348,49.53 117.399,49.479 117.871,49.479 R17.2 R16.2 119.495,49.303 120.697,49.303 v1(120.7,49.3)
  other v1: 126.2,81.9 127.5,81.9 126.2,83.4 127.5,83.4
ACDRV: Q1.4 Q2.4 U1.31 Z1.1 | length 41.3
  Top Layer w0.2: v1(105.04,61.013) 105.149,61.013 105.435,60.727 105.444,60.727 105.669,60.502 U1.31
  Top Layer w0.3: v1(85.959,86.705) 85.964,86.7 Q2.4 ; v1(93.1,82.6) 93.125,82.625 93.125,83.666 93.165,83.706 Q1.4
  Bottom Layer w0.2: v1(93.1,82.6) 105.177,70.523 105.177,65.89 105.04,65.754 v1(105.04,61.013)
  Bottom Layer w0.3: v1(85.959,86.705) 90.064,82.6 v1(93.1,82.6)
ACOV: R7.1 R10.2 U1.35 | length 3.6
  Top Layer w0.2: R10.2@104.507,57.051 104.507,58.502 U1.35
ACUV: R6.1 R7.2 U1.34 | length 5.8
  Top Layer w0.2: R6.1 102.25,58.75 102.467,58.533 102.807,58.533 102.878,58.604 102.878,58.778 102.891,58.791 103.49,58.791 104.008,59.309 104.902,59.309 105.277,58.934 106.13,58.934 106.198,59.002 U1.34
BAT_DRV: Q5.4 Q6.4 U1.15 | length 23.8
  Top Layer w0.25: U1.15 113.207,60.002 113.405,60.2 v1(113.5,60.2)
  Top Layer w0.3: v1(125.2,55.4) 125.257,55.343 125.762,55.343 126.33,54.775 Q5.4 ; Q6.4 130.47,56.63 v1(130.7,56.4)
  Bottom Layer w0.25: v1(113.5,60.2) 116.6,57.1 119.4,57.1 121.9,54.6 123.662,54.6 124.4,55.338 125.138,55.338 v1(125.2,55.4) 129.7,55.4 v1(130.7,56.4)
BAT_SRC: Q5.1 Q5.2 Q5.3 Q6.1 Q6.2 Q6.3 U1.16 | length 16
  Top Layer w0.25: U1.16 113.021,60.502 113.519,61 122.24,61 126.04,57.2 Q6.1
BTST1: C7.1 D1.1 U1.26 | length 6.5
  Top Layer w0.2: D1.1 105.45,65.65 105.75,65.35 C7.1 106.75,63.5 107.6,63.5 108.288,62.812 U1.26
BTST2: C8.1 D2.1 U1.20 | length 8.7
  Top Layer w0.2: U1.20 111.3,62.164 111.3,62.6 111.5,62.8 112.3,62.8 114.45,64.95 C8.1 116.45,65 D2.1
FB: R8.1 R9.1 U1.12 | length 2.8
  Top Layer w0.2: U1.12 112.44,58.5 113,58.5 113.4,58.1 R8.1
FBG: R9.2 U1.11 | length 2.4
  Top Layer w0.2: U1.11 112.438,57.262 113.05,56.65 R9.2
GND: C1.2 C2.2 C3.1 C4.1 C5.1 C6.1 C9.2 C10.2 C11.1 C12.1 C14.1 C15.2 C16.1 C17.1 C18.1 C19.1 C20.1 C21.1 C22.1 C23.1 C25.1 C26.1 D3.2 IC1.2 J3.1 J4.1 J5.1 J7.1 P1.1 Q7.1 Q7.2 Q7.3 Q8.1 Q8.2 Q8.3 R2.1 R10.1 R11.1 R12.2 R19.1 R20.1 U1.7 U1.17 U1.22 U1.37 U2.4 | length 4.8
  Top Layer w0.25: U1.7 110.288,58.077 110.413,58.202 v2(110.698,58.202) ; v1(110.401,63.113) 110.334,63.046 110.334,62.839 110.288,62.793 U1.22 110.288,61.427 110.413,61.302 v2(110.698,61.302) ; U1.37@110.998,61.002 U1.17
  other v1: 114.2,50.2 83,50.7 84.9,50.7 83,52.1 84.9,52.1 113.1,53.6 82.4,53.7 83.7,53.7 118.1,53.8 132.5,54.8 114,55.7 103.744,56.335 102.528,59.544 100.5,61.6 100.5,63 80.8,64.6 149.1,66.6 81.3,67.7 108.9,67.7 110.3,67.7 147.1,68.7 149,68.7 139.4,69.3 142.6,69.3 147.1,70 149,70.1 81.2,71.3 135.3,72 81.2,75.1 135.4,75.4 129.7,78.2 81.2,78.6 141.397,79.248 99,79.6 100.2,79.6 143.9,79.8 80.8,83.7 82,83.7 80.8,85.5 82,85.5
  other v2: 108.378,58.202 109.538,58.202 107.488,59.137 108.378,59.137 109.538,59.137 110.698,59.137 111.588,59.137 107.488,60.367 108.378,60.367 109.538,60.367 110.698,60.367 111.588,60.367 108.378,61.302 109.538,61.302
HIDRV1: Q4.4 U1.27 | length 15.9
  Top Layer w0.2: Q4.4@96.3,69.97 96.4,70.07 v1(96.4,70.7) ; v1(107.289,62.955) 107.763,62.48 107.763,62.177 U1.27
  3V3 w0.2: v1(96.4,70.7) 99.543,70.7 v1(107.289,62.955)
HIDRV2: Q3.4 U1.19 | length 11.8
  Top Layer w0.2: U1.19 113.152,62.152 v1(113.2,62.2) ; v1(115.4,62.2) 117.8,62.2 120.695,65.095 Q3.4@122.333,65.095
  Bottom Layer w0.2: v1(113.2,62.2) v1(115.4,62.2)
INT: U1.3 U2.10 | length 16
  Top Layer w0.2: v1(108,56.3) 108,56.408 108.288,56.696 U1.3 ; U2.10 119.306,52.394 v1(119.9,51.8)
  Bottom Layer w0.2: v1(108,56.3) 110.1,54.2 115.862,54.2 118.262,51.8 v1(119.9,51.8)
LODRV1: Q8.4 U1.25 | length 23.3
  Top Layer w0.2: Q8.4@97.095,78.167 97.3,78.372 97.3,79.384 v1(97.308,79.392) ; v1(108.7,63.2) 108.763,63.137 108.763,62.177 U1.25
  3V3 w0.2: v1(97.308,79.392) 108.1,68.6 108.1,63.8 v1(108.7,63.2)
LODRV2: Q7.4 U1.21 | length 19.8
  Top Layer w0.2: U1.21 110.788,62.588 v1(111.9,63.7) ; v1(117.3,77.7) 117.833,77.167 Q7.4@118.595,77.167
  Bottom Layer w0.2: v1(111.9,63.7) 117.3,69.1 v1(117.3,77.7)
NetC22_2: C22.2 U2.5 | length 1.7
  Top Layer w0.2: C22.2 115.866,53.044 116.116,52.794 U2.5
NetC24_1: C24.1 IC1.1 | length 1.3
  Top Layer w0.254: C24.1 IC1.1
NetC24_2: C24.2 D3.1 IC1.6 L2.1
NetIC1_3: IC1.3 R18.1 R19.2 | length 5.1
  Top Layer w0.254: R18.1 R19.2 IC1.3
NetP2_1: P2.1 R13.2 | length 3.5
  Top Layer w0.2: P2.1@100.507,53.548 100.507,51.47 101.386,50.591 R13.2
NetP2_2: P2.2 U1.6 | length 12.8
  Top Layer w0.2: P2.2@100.507,56.088 102.295,54.3 109,54.3 110.027,55.327 110.027,56.373 109.788,56.612 U1.6
NetP3_1: P3.1 R14.2 | length 3.3
  Top Layer w0.2: P3.1 97.05,53.48 97.05,50.5 R14.2
NetP3_2: P3.2 U1.4 | length 13.8
  Top Layer w0.2: U1.4 108.813,57.327 108.813,57.102 108.818,57.097 v1(108.818,56.528)
  Bottom Layer w0.2: P3.2 98.87,56.07 100.498,57.698 100.798,57.698 100.8,57.7 105.5,57.7 106.273,56.927 108.419,56.927 v1(108.818,56.528)
NetP4_1: P4.1 R15.2 | length 3.3
  Top Layer w0.2: R15.2 93.6,50.35 P4.1
NetP4_2: P4.2 U1.5 | length 20
  Top Layer w0.2: U1.5 109.288,56.803 109.345,56.746 109.345,55.755 v1(109.4,55.7)
  Bottom Layer w0.2: P4.2 95.659,58.129 107.071,58.129 107.7,57.5 108.7,57.5 109.4,56.8 v1(109.4,55.7)
NetQ1_1: Q1.1 Q1.2 Q1.3 Q2.1 Q2.2 Q2.3 Z1.2
NetR11_2: R11.2 U1.36 | length 4.4
  Top Layer w0.2: R11.2@104.255,55.626 105.283,55.626 105.664,56.007 105.664,57.785 105.881,58.002 U1.36
NetR12_1: R12.1 U1.9 | length 1.9
  Top Layer w0.2: U1.9 111.299,57.341 111.299,55.511 R12.1@111.31,55.5
NetR20_2: R20.2 U1.10 | length 3.1
  Top Layer w0.2: U1.10 111.788,56.712 112,56.5 R20.2
P_OUT: C9.1 Q3.5-6-7-8 Q6.5-6-7-8 R3.1 R4.2 | length 24.6
  Top Layer w0.254: Q6.5-6-7-8@126.66,62.675 126.66,61.878 128.358,60.18 Q6.5-6-7-8@128.565,60.18 ; Q6.5-6-7-8@127.93,62.675 127.93,60.815 Q6.5-6-7-8@128.565,60.18 ; Q6.5-6-7-8@129.2,62.675 129.2,60.815 Q6.5-6-7-8@128.565,60.18 ; Q6.5-6-7-8@130.47,62.675 130.47,61.878 128.772,60.18 Q6.5-6-7-8@128.565,60.18
  Top Layer w0.3: Q3.5-6-7-8@127.752,65.095 127.552,65.295 126.705,65.295 125.3,66.7 Q3.5-6-7-8@125.3,67 ; Q3.5-6-7-8@127.752,66.365 125.935,66.365 Q3.5-6-7-8@125.3,67 ; Q3.5-6-7-8@127.752,67.635 125.935,67.635 Q3.5-6-7-8@125.3,67 ; Q3.5-6-7-8@127.752,68.905 127.552,68.705 126.705,68.705 125.3,67.3 Q3.5-6-7-8@125.3,67
REGN: C12.2 C19.2 D1.2 D2.2 R1.2 U1.23 U1.24 | length 35
  Top Layer w0.2: D1.2 102.633,67.083 103.383,67.083 104.5,68.2 106.3,68.2 107.1,67.4 107.1,66.75 C19.2 108.9,63.9 109.3,63.5 109.3,62.164 U1.24 U1.23 109.8,62.164 109.8,63.5 110,63.7 ; v1(109.5,64) 109.608,64 109.908,63.7 110,63.7 ; R1.2@113.272,51.5 113.272,52.472 113.9,53.1 v1(113.9,54.8) ; D2.2 113.4,66.85 113.4,65.8 112.55,64.95 C12.2 110.2,63.9 110,63.7
  Bottom Layer w0.2: v1(109.5,64) 109.5,63.269 112.412,60.357 112.412,56.288 v1(113.9,54.8)
RST: C23.2 P1.2 U2.1 | length 8.4
  Top Layer w0.2: U2.1 116.715,56.351 C23.2 119.571,56.451 120.142,55.88 P1.2
SCL: R16.1 U1.1 U2.9 | length 20.1
  Top Layer w0.2: v1(106.4,56.4) 106.477,56.477 106.588,56.477 107.288,57.177 U1.1 ; U2.9 118.615,51.819 118.872,51.562 119.253,51.562 119.492,51.323 R16.1 119.5,50.798 v1(119.5,50.1)
  Bottom Layer w0.2: v1(106.4,56.4) 107.027,55.773 108.065,55.773 110.938,52.9 116.7,52.9 v1(119.5,50.1)
SDA: R17.1 U1.2 U2.8 | length 19
  Top Layer w0.2: v1(106.2,55.4) 107.763,56.963 107.763,57.327 U1.2 ; v1(118,50.1) 118,50.762 R17.1 118.044,51.369 118.115,51.44 U2.8
  Bottom Layer w0.2: v1(106.2,55.4) 107.938,55.4 111.138,52.2 115.9,52.2 v1(118,50.1)
SRN: C13.2 C16.2 R5.1 U1.13 | length 34.3
  Top Layer w0.2: U1.13 112.463,59.027 115.927,59.027 v1(116,59.1) ; v1(138.8,58.1) 138.881,58.1 139.031,57.95 C16.2 140.15,57.9 143.25,57.9 R5.1 C13.2
  Bottom Layer w0.2: v1(116,59.1) 116.027,59.073 121.273,59.073 121.647,59.447 137.453,59.447 v1(138.8,58.1)
SRP: C13.1 C15.1 R4.1 U1.14 | length 34.9
  Top Layer w0.3: U1.14 113.818,59.502 114.516,60.2 119.4,60.2 122.5,57.1 v1(124.6,57.1) ; v1(131.7,56.8) 132.65,55.85 R4.1 ; R4.1@134,55.75 134.05,55.7 C15.1 C13.1@143.32,53.8
  Bottom Layer w0.25: v1(124.6,57.1) 131.379,57.1 131.679,56.8 v1(131.7,56.8)
SW1: C7.2 L1.1 Q4.1 Q4.2 Q4.3 Q8.5-6-7-8 U1.28 | length 23.2
  Top Layer w0.2: 98,66.2 99.7,64.5 C7.2 104.25,63.65 105.748,62.152 U1.28
  Top Layer w0.3: Q8.5-6-7-8@97.095,72.748 97.295,72.948 97.295,73.795 98.5,75 98.8,75 98.365,74.565 Q8.5-6-7-8@98.365,72.748 ; Q8.5-6-7-8@99.635,72.748 99.635,74.565 99,75.2 99.3,75.2 100.7,73.8 100.7,73.5 100.705,73.495 100.705,72.948 Q8.5-6-7-8@100.905,72.748
SW2: C8.2 L1.2 Q3.1 Q3.2 Q3.3 Q7.5-6-7-8 U1.18 | length 24.2
  Top Layer w0.2: U1.18 113.602,61.502 115.55,63.45 C8.2 118.05,63.45 120.8,66.2 120.8,66.248 120.917,66.365 Q3.3@122.333,66.365
  Top Layer w0.3: Q7.5-6-7-8@118.595,71.748 118.795,71.948 118.795,72.795 120.2,74.2 Q7.5-6-7-8@120.5,74.2 ; Q7.5-6-7-8@119.865,71.748 119.865,73.565 Q7.5-6-7-8@120.5,74.2 ; Q7.5-6-7-8@121.135,71.748 121.135,73.565 Q7.5-6-7-8@120.5,74.2 ; Q7.5-6-7-8@122.405,71.748 122.205,71.948 122.205,72.495 122.2,72.5 122.2,72.8 120.8,74.2 Q7.5-6-7-8@120.5,74.2
SWIM: P1.3 U2.15 | length 4.2
  Top Layer w0.2: U2.15 120.466,54.794 121.92,53.34 P1.3
TS: J5.2 R1.1 R2.2 U1.8 | length 10.4
  Top Layer w0.2: J5.2@108.854,52.832 108.966,52.943 108.966,53.566 110.783,55.383 110.783,56.017 110.788,56.021 U1.8
  Top Layer w0.203: J5.2 110.159,51.5 R1.1 R2.2
VBAT: C10.1 C11.2 C25.2 IC1.4 IC1.5 J6.1 R3.2 R5.2 R8.2 | length 48.3
  Top Layer w0.2: R8.2 117.1,58.1 v1(118.6,59.6) ; v1(132.4,65.6) 134.85,65.6 R3.2
  Top Layer w0.5: C10.1 141,64.65 141.55,65.2 143.8,65.2 144.4,65.8 144.4,73.9 146.3,75.8 146.3,81.6 145.05,82.85 IC1.5
  Bottom Layer w0.2: v1(118.6,59.6) 124.6,65.6 v1(132.4,65.6)
VIN: C17.2 C18.2 J1.1 Q1.5-6-7-8 R6.2 U1.29 U1.30 U1.33 | length 49.2
  Top Layer w0.2: v1(105.912,59.461) 105.953,59.502 U1.33
  Top Layer w0.25: v1(95.9,78.8) 95.9,82.194 96.303,82.597 ; 96.9,82.6 96.897,82.597 96.303,82.597 ; 98.3,82.9 96.606,82.9 96.303,82.597 ; R6.2 102.282,60.25 102.903,60.871 102.903,61.403 C17.2 ; v1(102.7,63.9) 103,63.6 C18.2 C17.2 ; v1(105.9,61.029) 105.913,61.015 106.625,61.015 U1.30 U1.29 ; U1.29 U1.29 105.65,61.5 105.412,61.738 103.238,61.738 C17.2
  Top Layer w0.3: Q1.5-6-7-8@100.772,83.706 99.952,83.706 98.277,85.381 Q1.5-6-7-8@98.277,85.611 ; Q1.5-6-7-8@100.772,84.976 98.912,84.976 Q1.5-6-7-8@98.277,85.611 ; Q1.5-6-7-8@100.772,86.246 98.912,86.246 Q1.5-6-7-8@98.277,85.611 ; Q1.5-6-7-8@100.772,87.516 99.952,87.516 98.277,85.841 Q1.5-6-7-8@98.277,85.611
  Bottom Layer w0.2: v1(105.9,61.029) 105.9,59.473 v1(105.912,59.461)
  Bottom Layer w0.25: v1(95.9,78.8) 95.848,78.748 95.848,70.471 102.352,63.967 102.633,63.967 v1(102.7,63.9)
VSYS: C1.1 C2.1 C3.2 C4.2 C5.2 C6.2 C14.2 J2.1 Q2.5-6-7-8 Q4.5-6-7-8 Q5.5-6-7-8 U1.32 | length 48.7
  Top Layer w0.3: Q2.5-6-7-8@86.73,81.225 86.73,82.045 88.405,83.72 Q2.5-6-7-8@88.635,83.72 ; Q2.5-6-7-8@88,81.225 88,83.085 Q2.5-6-7-8@88.635,83.72 ; Q2.5-6-7-8@89.27,81.225 89.27,83.085 Q2.5-6-7-8@88.635,83.72 ; Q2.5-6-7-8@90.54,81.225 90.54,82.045 88.865,83.72 Q2.5-6-7-8@88.635,83.72 ; Q4.5-6-7-8@90.881,66.16 91.081,66.36 91.928,66.36 92.984,67.416 92.97,67.43 Q4.5-6-7-8@90.881,67.43 ; Q4.5-6-7-8@90.881,68.7 92.698,68.7 93.333,68.065 93.333,68.365 91.928,69.77 91.081,69.77 Q4.5-6-7-8@90.881,69.97 ; 93.9,60.9 v1(100,60.9) ; v1(104.2,60.9) 104.2,60.85 105.048,60.002 105.637,60.002 105.673,60.038 106.151,60.038 106.187,60.002 U1.32 ; Q5.5-6-7-8@126.33,49.225 126.33,50.045 128.005,51.72 Q5.5-6-7-8@128.235,51.72 ; Q5.5-6-7-8@127.6,49.225 127.6,51.085 Q5.5-6-7-8@128.235,51.72 ; Q5.5-6-7-8@128.87,49.225 128.87,51.085 Q5.5-6-7-8@128.235,51.72 ; Q5.5-6-7-8@130.14,49.225 130.14,50.045 128.465,51.72 Q5.5-6-7-8@128.235,51.72
  Bottom Layer w0.3: v1(100,60.9) v1(104.2,60.9)
pads on no net: U2.2 U2.3 U2.7 U2.11 U2.12 U2.13 U2.14 U2.16 U2.17 U2.18 U2.19 U2.20

## Polygon pours and split planes (outlines as drawn)
SW2 on Top Layer "SW2_L01_P020" (solid, pour order 20): 117.636,75.864 115.9,77.6 112.6,77.6 111.8,76.8 111.8,72 114.2,69.6 117.2,69.6 121.1,65.7 123.1,65.7 123.5,66.1 123.5,75.2 122.836,75.864
GND on Top Layer "GND_L01_P021" (solid, pour order 21): 78.9,46.6 151.1,46.6 151.1,89 78.9,89
BAT_SRC on Top Layer "BAT_SRC_L01_P006" (solid, pour order 6): 129.9,57.789 129.589,58.1 126.39,58.1 126,57.71 126,56.5 126.9,55.6 126.9,54.156 127.218,53.837 130.462,53.837 130.745,54.12 130.745,55.555 130.6,55.7 129.9,56.4 130.6,55.7 129.9,56.4
NetQ1_1 on Top Layer "NETQ1_1_L01_P010" (solid, pour order 10): 87.494,85.9 87.3,86.094 87.3,87.5 88,88.2 95.92,88.2 96.2,87.92 96.2,84.615 95.885,84.3 94.5,84.3 92.9,85.9
VSYS on Top Layer "VSYS_L01_P011" (solid, pour order 11): 91.7,85 91.1,85.6 86.2,85.6 84,83.4 84,63 83.3,62.3 82.2,62.3 81.2,61.3 81.2,58.6 81.7,58.1 91.5,58.1 94.9,61.5 94.9,76.9 91.7,80.1
NetC24_2 on Top Layer "NONET_L-01_P-001" (solid, pour order 3): 139.1,85.6 133.8,85.6 133.3,85.1 133.3,79.7 133.8,79.2 136.3,79.2 136.7,79.6 136.7,80.1 137.6,81 139.8,81 140.9,82.1 140.9,83.8
3V3 on Top Layer "NONET_L-01_P-001" (solid, pour order 5): 132.4,85.6 126.2,85.6 124.9,84.3 124.9,80.6 126.3,79.2 132.4,79.2 132.9,79.7 132.9,85.1
VBAT on Top Layer "VBAT_L01_P017" (solid, pour order 17): 133.6,63.3 132.8,64.1 132.8,66.9 133.4,67.5 137.6,67.5 138.8,66.3 144.7,66.3 146.1,64.9 149.5,64.9 150.6,63.8 150.6,58.5 149.4,57.3 146.4,57.3 145,58.7 141.3,58.7 136.7,63.3
VSYS on Top Layer "VSYS_L01_P015" (solid, pour order 15): 131.4,52.894 130.694,53.6 125.848,53.6 125.3,53.052 125.3,49.6 124.4,48.7 93.5,48.7 91.6,50.6 91.6,58.2 87.8,62 81.9,62 81.2,61.3 81.2,56.2 81.8,55.6 87.1,55.6 88,54.7 88,49.8 90.3,47.5 130.3,47.5 131.4,48.6
SW1 on Top Layer "SW1_L01_P007" (solid, pour order 7): 107.3,76.7 106.9,77.1 96.906,77.1 96.4,76.594 96.4,71.881 97.3,70.981 97.3,69.6 97.1,69.4 95.5,69.4 95.2,69.1 95.2,65.5 95.6,65.1 97.3,65.1 100.4,68.2 102.2,70 105.6,70 107.3,71.7
VIN on Top Layer "VIN_L01_P014" (solid, pour order 14): 104.1,88.3 96.84,88.3 96.3,87.76 96.3,82.8 96.7,82.4 104.7,82.4 105.789,83.489 105.789,86.611
P_OUT on Top Layer "P_OUT_L01_P016" (solid, pour order 16): 127.3,75.6 123.6,71.9 123.6,63.3 125.2,61.7 125.2,58.9 125.8,58.3 131,58.3 132.8,56.5 135.8,56.5 137.3,58 137.3,60.7 135.9,62.1 134,62.1 131.9,64.2 131.9,75.1 131.4,75.6
GND on 3V3 "GND_L02_P008" (solid, pour order 8): 78.9,47.09 151.1,47.09 151.1,89 78.9,89
3V3 on 3V3 "3V3_L02_P001" (solid, pour order 1): 93.6,49.6 93.6,51.1 94,51.5 111.2,51.5 125,65.3 125,84.4 126.2,85.6 127.7,85.6 128.7,84.6 128.7,83.1 128.7,52.7 124.8,48.8 94.4,48.8
GND on GND "GND_L03_P004" (solid, pour order 4): 77.6,46.6 151.7,46.6 151.7,89 77.6,89
GND on Bottom Layer "GND_L04_P018" (solid, pour order 18): 78.9,47.09 151.1,47.09 151.1,89 78.9,89

## Silkscreen, mask and mechanical layers (free items; w line width, h text height)
Top Overlay:
  text "VAC" at 104.833,88.5 h1 r180
  text "SYS" at 80.3,61.333 h1 r270
  text "VBAT" at 145.5,58.167 h1 r90
Bottom Overlay:
  text "GND" at 128.049,57.92 h1
  text "RST" at 128.049,55.38 h1
  text "SWIM" at 128.049,52.84 h1
  text "3V3" at 128.049,50.3 h1
Mechanical 1:
  the board outline again, w0.1

## Text inside footprints (layer, text, board x,y; h text height)
C1: Top Overlay "+" at 88.901,68.652 h1.5
C2: Top Overlay "+" at 88.9,76.15 h1.5
C9: Top Overlay "+" at 127.623,74.554 h1.5 r180
C10: Top Overlay "+" at 140.25,61.6 h1.5 r270